# EAGLE board simple-spectro (EAGLE 8.3.2)
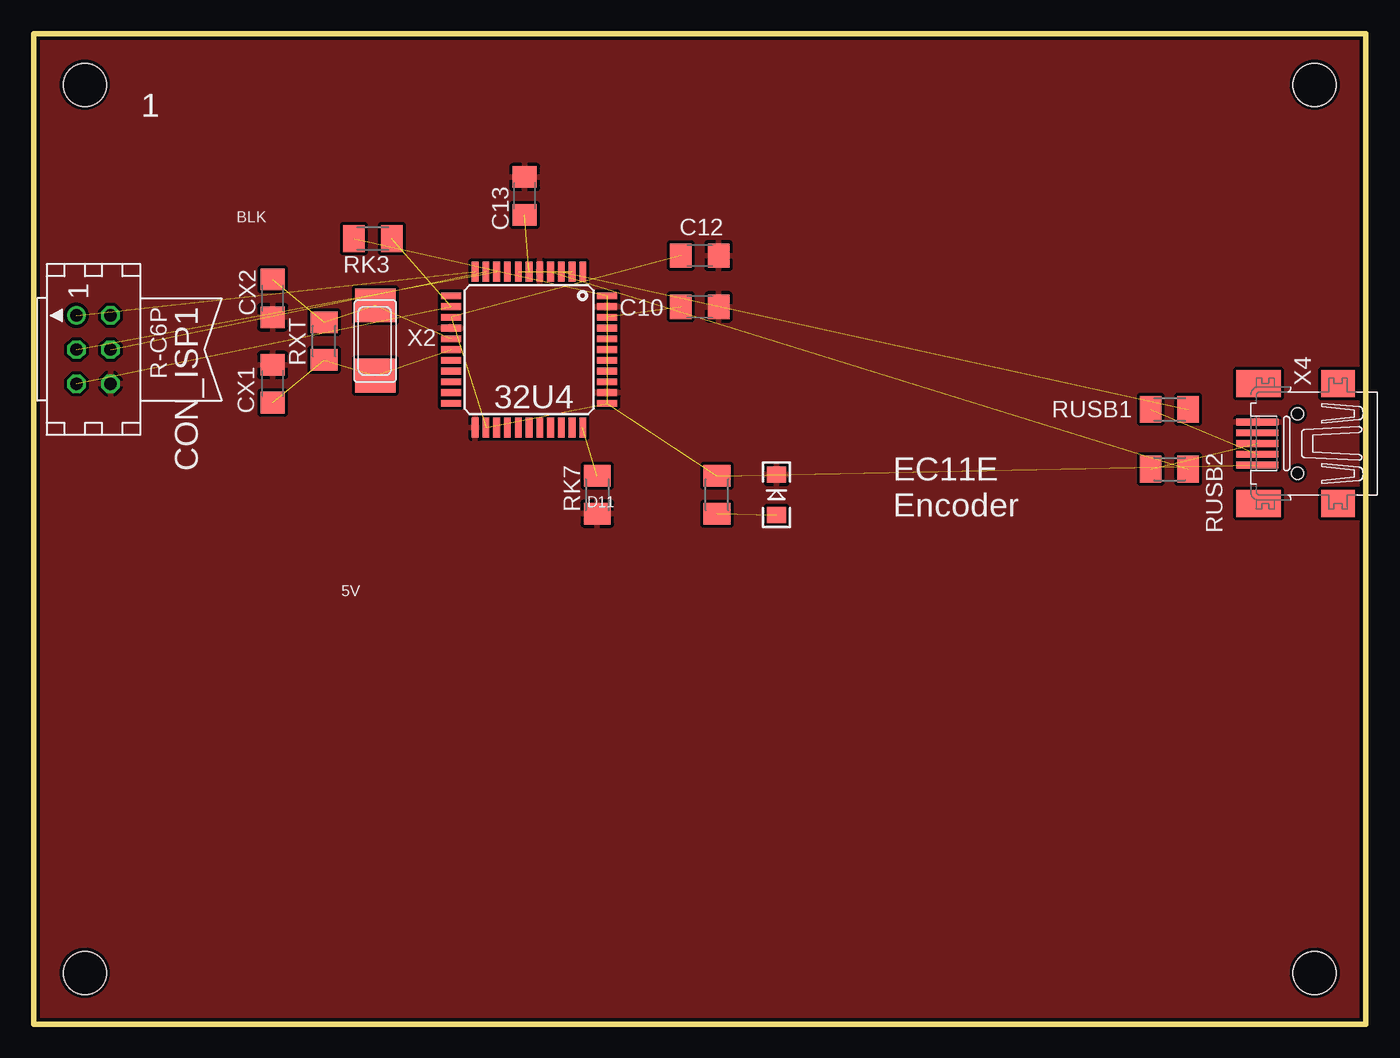
[diagram p0: board, top side]

Size 99.06 x 73.66 mm. Coordinates in mm from the lower left corner, seen from the top.
Outline: 0,73.66 0,0 99.06,0 99.06,73.66 0,73.66
Copper layers (1*2*15*16): Top 0.035mm / dielectric 0.2mm / layer 2 0.0175mm / dielectric 1.1mm / layer 15 0.0175mm / dielectric 0.2mm / Bottom 0.035mm
Design rules "SeeedStudio_DRU_no_angle_20130527": minimum track width 6mil, minimum drill 12mil, track to track 6mil, track to pad 6mil, pad to pad 6mil, via to via 6mil, smd to smd 0mil, copper to edge 10mil, drill to drill 10mil, minimum pad ring 6mil, minimum via ring 6mil, stop-mask expansion 2mil, vias tented up to drill 25mil, thermal gap 10mil
Net classes: 0 default: width 0.406 mm, clearance 0.25 mm; 1 power: width 0.406 mm, drill 0.305 mm, clearance 0.25 mm; 2 VIN: width 0.406 mm, clearance 0.25 mm; 3 fine: width 0.406 mm, clearance 0.25 mm; 4 aref: width 0.406 mm, clearance 0.25 mm
Holes 3.2 mm at 3.81,69.85 3.81,3.81 95.25,69.85 95.25,3.81

## Footprints (pad centres in the part's own frame; a part is rotated, then mirrored left to right if it is on the bottom)
TQFP44 = smd 1.5 x 0.5: 1 -5.8,4; 2 -5.8,3.2; 3 -5.8,2.4; 4 -5.8,1.6; 5 -5.8,0.8; 6 -5.8,0; 7 -5.8,-0.8; 8 -5.8,-1.6; 9 -5.8,-2.4; 10 -5.8,-3.2; 11 -5.8,-4; 23 5.8,-4; 24 5.8,-3.2; 25 5.8,-2.4; 26 5.8,-1.6; 27 5.8,-0.8; 28 5.8,0; 29 5.8,0.8; 30 5.8,1.6; 31 5.8,2.4; 32 5.8,3.2; 33 5.8,4 | smd 0.5 x 1.5: 12 -4,-5.8; 13 -3.2,-5.8; 14 -2.4,-5.8; 15 -1.6,-5.8; 16 -0.8,-5.8; 17 0,-5.8; 18 0.8,-5.8; 19 1.6,-5.8; 20 2.4,-5.8; 21 3.2,-5.8; 22 4,-5.8; 34 4,5.8; 35 3.2,5.8; 36 2.4,5.8; 37 1.6,5.8; 38 0.8,5.8; 39 0,5.8; 40 -0.8,5.8; 41 -1.6,5.8; 42 -2.4,5.8; 43 -3.2,5.8; 44 -4,5.8
C1206 = smd 1.6 x 1.8: 1 -1.4,0; 2 1.4,0
TINYISP = drill 0.914 octagon: GND 2.54,1.27; MOSI 0,1.27; RESET 2.54,-1.27; SCK 0,-1.27; VCC -2.54,1.27 | drill 0.914: MISO -2.54,-1.27
LED-1206 = smd 1.2 x 1.4: A -1.5,0; C 1.5,0
M1206 = smd 1.6 x 2: 1 -1.4,0; 2 1.4,0
NX6035 = smd 2.5 x 3: P$1 2.665,0; P$2 -2.565,0
32005-201 = smd 3.1 x 0.5: 1 3,1.6; 2 3,0.8; 3 3,0; 4 3,-0.8; 5 3,-1.6 | smd 2.5 x 2: M1 -3,-4.45; M2 -3,4.45 | smd 3.3 x 2: M3 2.9,4.45; M4 2.9,-4.45 | hole 0.9: 0,2.2; 0,-2.2

## Placement (x,y rotation side)
32U4  32U4  [TQFP44]  36.83,50.16 270 top
C10  100nF  [C1206]  49.53,53.34 0 top
C12  100nF  [C1206]  49.53,57.15 180 top
C13  100nF  [C1206]  36.51,61.59 270 top
CON_ISP1  SPI  [TINYISP]  4.45,50.16 270 top
CX1  22pF  [C1206]  17.78,47.62 270 top
CX2  22pF  [C1206]  17.78,53.98 90 top
LDPW5  RED  [LED-1206]  55.24,39.37 90 top
R13  1k  [M1206]  50.8,39.37 270 top
RK3  10k  [M1206]  25.23,58.42 180 top
RK7  10k  [M1206]  41.91,39.37 90 top
RUSB1  22  [M1206]  84.45,45.72 180 top
RUSB2  22  [M1206]  84.45,41.27 180 top
RXT  1M  [M1206]  21.59,50.8 270 top
X2  8MHz  [NX6035]  25.4,50.8 90 top
X4  MINI-USB  [32005-201]  93.98,43.18 180 top

## Library data of the parts
32U4 = adafruit
C10 C12 C13 CX1 CX2 = resistor
CON_ISP1 = lpatiny; OC_FARNELL: unknown; OC_NEWARK: unknown
LDPW5 = SparkFun
R13 RK3 RK7 RUSB1 RUSB2 RXT = rcl
X2 = lpatiny
X4 = con-cypressindustries; OC_FARNELL: unknown; OC_NEWARK: unknown

## Nets
A0: 32U4.36
A1: 32U4.37
A2: 32U4.38
A3: 32U4.39
A4: 32U4.40
A5: 32U4.41
A6: 32U4.25
AREF: 32U4.42 C10.1
D5*: 32U4.31
D6*: 32U4.27
D7*: 32U4.1
D8*: 32U4.28
D9*: 32U4.29
D10*: 32U4.30
D11*: 32U4.12
D12*: 32U4.26
D13*: 32U4.32
GND [power]: 32U4.5 32U4.15 32U4.23 32U4.35 32U4.43 C10.2 C12.1 C13.1 CON_ISP1.GND CX1.1 CX2.1 LDPW5.C RK7.1 X4.5
HWB: 32U4.33 RK7.2
ISP+5V: CON_ISP1.VCC
MISO: 32U4.11 CON_ISP1.MISO
MOSI: 32U4.10 CON_ISP1.MOSI
N$1: 32U4.6 C13.2
N$12: LDPW5.A R13.2
N$42: 32U4.17 CX1.2 RXT.2 X2.P$2
RESET: 32U4.13 CON_ISP1.RESET RK3.1
RX: 32U4.20
RXLED: 32U4.8
SCK: 32U4.9 CON_ISP1.SCK
SCL: 32U4.18
SDA: 32U4.19
TX: 32U4.21
TXLED: 32U4.22
USB_N: 32U4.3 RUSB1.1
USB_P: 32U4.4 RUSB2.1
USBC_N: RUSB1.2 X4.2
USBC_P: RUSB2.2 X4.3
VCC: 32U4.14 32U4.24 32U4.34 32U4.44 C12.2 R13.1 RK3.2 X4.1
VUSB: 32U4.2 32U4.7
XTAL1: 32U4.16 CX2.2 RXT.1 X2.P$1

## Tracks (layer width: path | path; a pad name or v marks a point on that pad's centre or on a via)
AREF  (1 unrouted)
GND
  pour Top: 0,73.66 0,0 99.06,0 99.06,73.66
HWB  (1 unrouted)
MISO  (1 unrouted)
MOSI  (1 unrouted)
N$1  (1 unrouted)
N$12  (1 unrouted)
N$42  (3 unrouted)
RESET  (2 unrouted)
SCK  (1 unrouted)
USB_N  (1 unrouted)
USB_P  (1 unrouted)
USBC_N  (1 unrouted)
USBC_P  (1 unrouted)
VCC  (7 unrouted)
VUSB  (1 unrouted)
XTAL1  (3 unrouted)

## Text on the board
tNames: 1 | BLK | D11 | EC11E / Encoder | 5V
bNames: Bio4_LCD_v1.1
tValues: Tutorial V 1.0.0
bValues: Tutorial V 1.0.0